# Altium PCB PCB1.PcbDoc (part 4 of 4)
Units mil, origin at the board's own origin, x right, y up, seen from the top; angles counter-clockwise.
Board outline 5048.23 x 6841.54 mil, 6 copper layers (Top Layer, Layer 1, Layer 2, Layer 3, Layer 4, Bottom Layer), stack 32.112 mil thick; 417 components, 339 nets, 2232 pads, 0 vias.
Unrouted connection lines stored in the file: 1169.
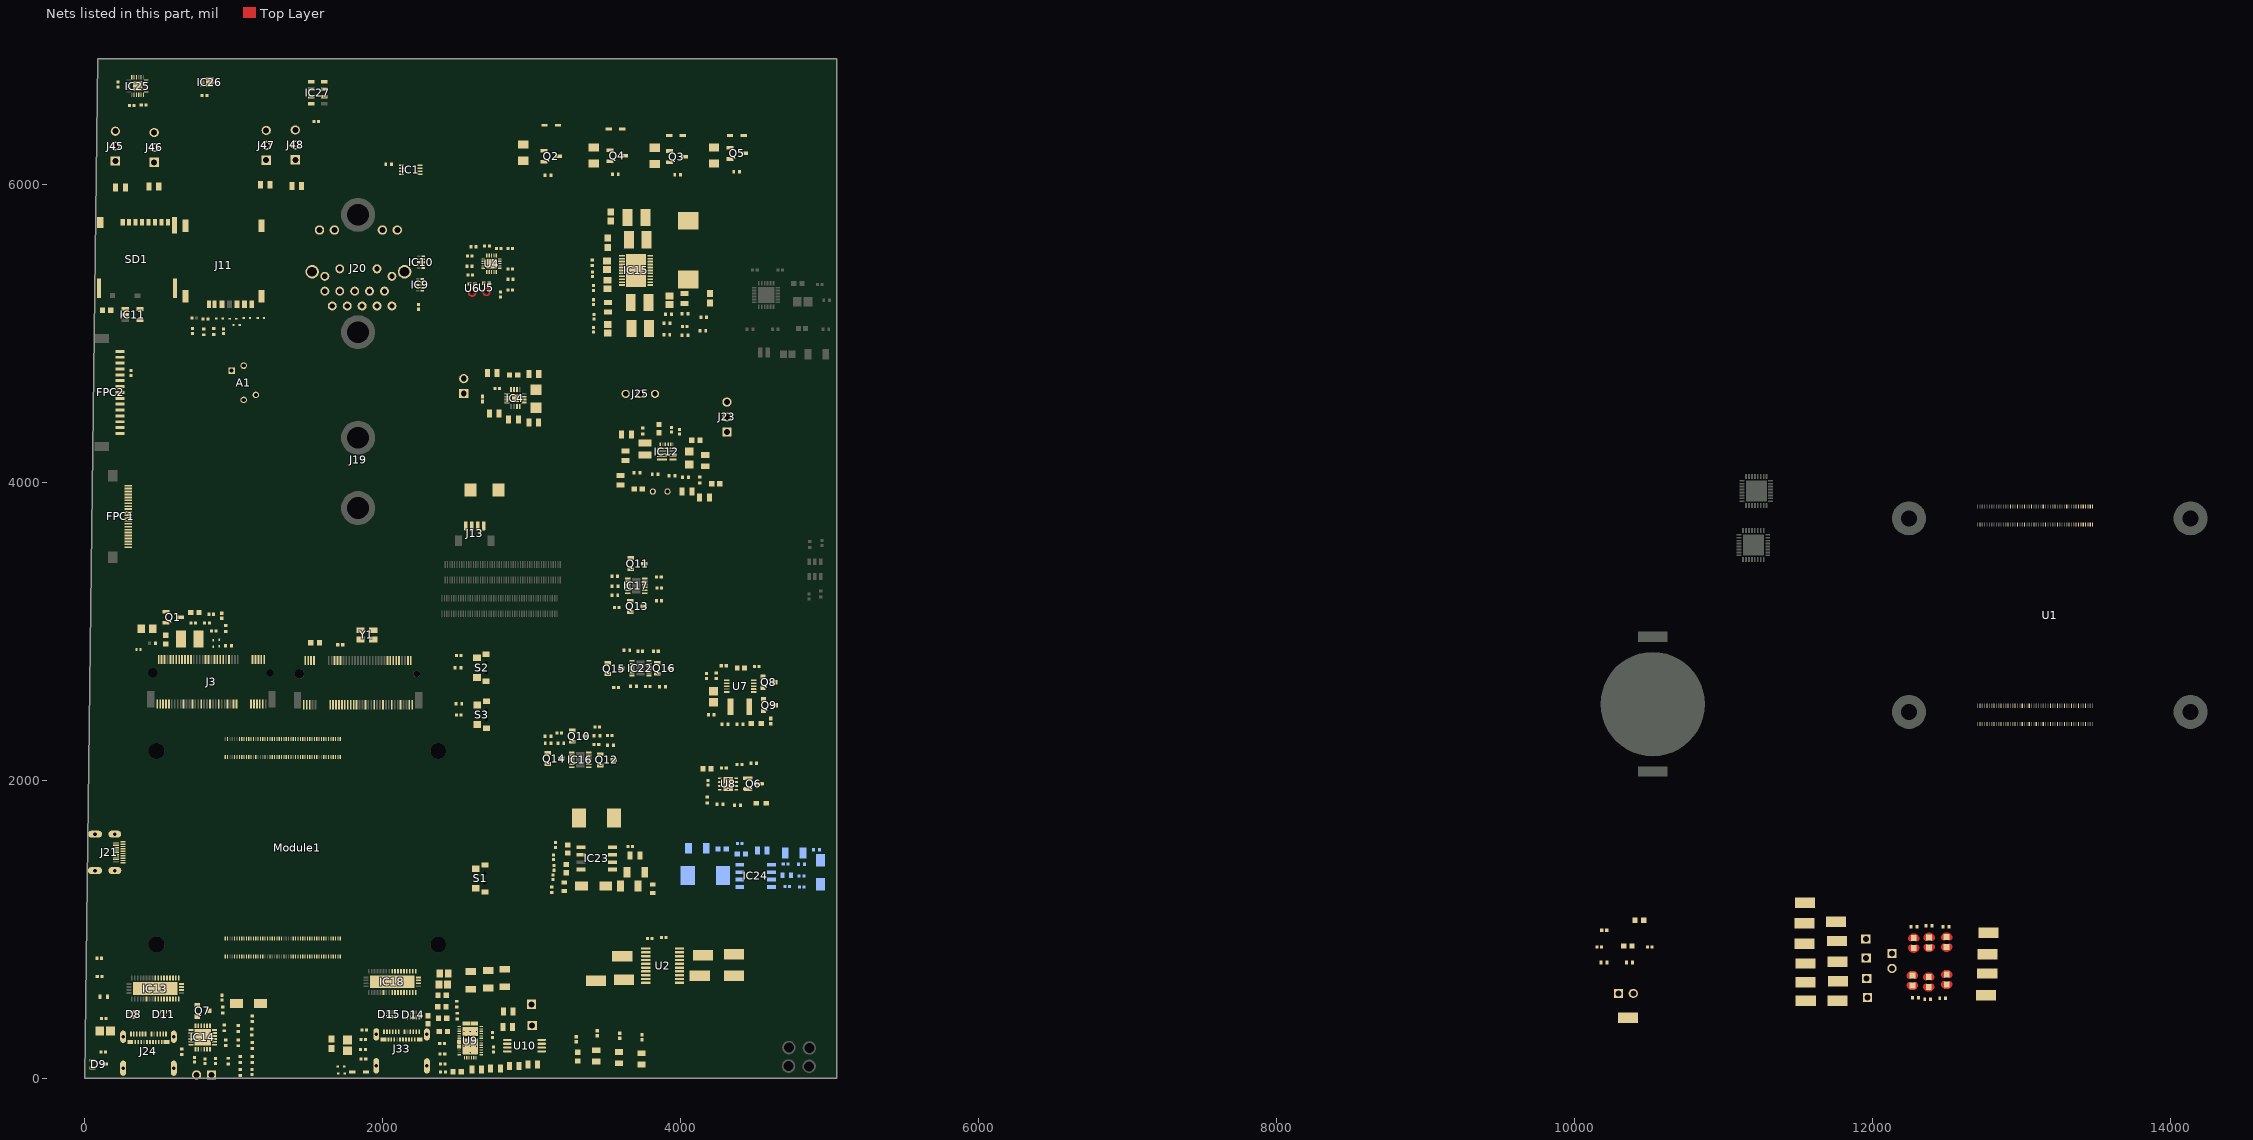
[diagram p3: the nets of this part, all layers, seen from the top]

## Part data (continued)
R80: library part CMP-26527-002093-1, "C25769", Case/Package=0402, Max Operating Temperature=155°C, Max Power Dissipation=63mW, Min Operating Temperature=-55°C, Resistance=3.9R, Resistor Type="Thick Film", Temperature Coefficient=200ppm/°C, Tolerance=5%, Contact Plating=Tin, Features="Automotive AEC-Q200", Height=0.016inch, Length=0.039inch, Mount="Surface Mount", Number of Terminations=2, Packaging="Tape and Reel", Radiation Hardening=No, RoHS Compliant=Yes, Series=RMCF, Width=0.02inch
R90: library part CMP-26527-005729-1, "C22939", Case/Package=0603, Max Operating Temperature=155°C, Max Power Dissipation=100mW, Min Operating Temperature=-55°C, Resistance=1.02kR, Resistor Type="Thick Film", Temperature Coefficient=100ppm/°C, Tolerance=1%, Contact Plating=Tin, Features="Automotive AEC-Q200", Height=0.022inch, Length=0.061inch, Mount="Surface Mount", Number of Terminations=2, Packaging="Tape and Reel", Radiation Hardening=No, RoHS Compliant=Yes, Series=RMCF, Width=0.031inch
R96 R98 R108: library part CMP-26527-002093-1, "C25908", Case/Package=0402, Max Operating Temperature=155°C, Max Power Dissipation=63mW, Min Operating Temperature=-55°C, Resistance=3.9R, Resistor Type="Thick Film", Temperature Coefficient=200ppm/°C, Tolerance=5%, Contact Plating=Tin, Features="Automotive AEC-Q200", Height=0.016inch, Length=0.039inch, Mount="Surface Mount", Number of Terminations=2, Packaging="Tape and Reel", Radiation Hardening=No, RoHS Compliant=Yes, Series=RMCF, Width=0.02inch
R99: library part CMP-26527-005729-1, "C322150", Case/Package=0603, Max Operating Temperature=155°C, Max Power Dissipation=100mW, Min Operating Temperature=-55°C, Resistance=1.02kR, Resistor Type="Thick Film", Temperature Coefficient=100ppm/°C, Tolerance=1%, Contact Plating=Tin, Features="Automotive AEC-Q200", Height=0.022inch, Length=0.061inch, Mount="Surface Mount", Number of Terminations=2, Packaging="Tape and Reel", Radiation Hardening=No, RoHS Compliant=Yes, Series=RMCF, Width=0.031inch
R103: library part CMP-26527-004332-1, "C22797", Case/Package=0603, Max Operating Temperature=155°C, Max Power Dissipation=100mW, Min Operating Temperature=-55°C, Resistance=2.21kR, Resistor Type="Thick Film", Temperature Coefficient=100ppm/°C, Tolerance=1%, Contact Plating=Tin, Features="Automotive AEC-Q200", Height=0.022inch, Length=0.061inch, Mount="Surface Mount", Number of Terminations=2, Packaging="Tape and Reel", Radiation Hardening=No, RoHS Compliant=Yes, Series=RMCF, Width=0.031inch
R105 R122: library part CMP-26527-004332-1, "C22984", Case/Package=0603, Max Operating Temperature=155°C, Max Power Dissipation=100mW, Min Operating Temperature=-55°C, Resistance=2.21kR, Resistor Type="Thick Film", Temperature Coefficient=100ppm/°C, Tolerance=1%, Contact Plating=Tin, Features="Automotive AEC-Q200", Height=0.022inch, Length=0.061inch, Mount="Surface Mount", Number of Terminations=2, Packaging="Tape and Reel", Radiation Hardening=No, RoHS Compliant=Yes, Series=RMCF, Width=0.031inch
R107 R124: library part CMP-26527-002093-1, "C25890", Case/Package=0402, Max Operating Temperature=155°C, Max Power Dissipation=63mW, Min Operating Temperature=-55°C, Resistance=3.9R, Resistor Type="Thick Film", Temperature Coefficient=200ppm/°C, Tolerance=5%, Contact Plating=Tin, Features="Automotive AEC-Q200", Height=0.016inch, Length=0.039inch, Mount="Surface Mount", Number of Terminations=2, Packaging="Tape and Reel", Radiation Hardening=No, RoHS Compliant=Yes, Series=RMCF, Width=0.02inch
R109: library part CMP-26527-002093-1, "C25104", Case/Package=0402, Max Operating Temperature=155°C, Max Power Dissipation=63mW, Min Operating Temperature=-55°C, Resistance=3.9R, Resistor Type="Thick Film", Temperature Coefficient=200ppm/°C, Tolerance=5%, Contact Plating=Tin, Features="Automotive AEC-Q200", Height=0.016inch, Length=0.039inch, Mount="Surface Mount", Number of Terminations=2, Packaging="Tape and Reel", Radiation Hardening=No, RoHS Compliant=Yes, Series=RMCF, Width=0.02inch
R115: library part CMP-26527-002287-1, "C23151", Case Code (Imperial)=0603, Case Code (Metric)=1608, Max Operating Temperature=155°C, Max Power Dissipation=100mW, Min Operating Temperature=-55°C, Resistance=110kR, Resistor Type="Thick Film", Temperature Coefficient=200ppm/°C, Tolerance=5%, Case/Package=0603, Contact Plating=Tin, Features="Automotive AEC-Q200", Height=0.022inch, Lead Free="Lead Free", Length=0.061inch, Mount="Surface Mount", Number of Terminations=2, Packaging="Tape and Reel", Power Rating=100mW, Radiation Hardening=No, RoHS Compliant=Yes, Series=RMCF, Size Code=0603, Width=0.031inch
R117: library part CMP-26527-002093-1, "C25924", Case/Package=0402, Max Operating Temperature=155°C, Max Power Dissipation=63mW, Min Operating Temperature=-55°C, Resistance=3.9R, Resistor Type="Thick Film", Temperature Coefficient=200ppm/°C, Tolerance=5%, Contact Plating=Tin, Features="Automotive AEC-Q200", Height=0.016inch, Length=0.039inch, Mount="Surface Mount", Number of Terminations=2, Packaging="Tape and Reel", Radiation Hardening=No, RoHS Compliant=Yes, Series=RMCF, Width=0.02inch
R118: library part CMP-26527-002093-1, "C51721", Case/Package=0402, Max Operating Temperature=155°C, Max Power Dissipation=63mW, Min Operating Temperature=-55°C, Resistance=3.9R, Resistor Type="Thick Film", Temperature Coefficient=200ppm/°C, Tolerance=5%, Contact Plating=Tin, Features="Automotive AEC-Q200", Height=0.016inch, Length=0.039inch, Mount="Surface Mount", Number of Terminations=2, Packaging="Tape and Reel", Radiation Hardening=No, RoHS Compliant=Yes, Series=RMCF, Width=0.02inch
RNTC1: library part CMP-06022-000440-1, "C338605", Case Code (Imperial)=0805, Case Code (Metric)=2012, Current Rating=100uA, Max Operating Temperature=125°C, Max Power Dissipation=200mW, Min Operating Temperature=-40°C, Package Quantity=4000, Resistance=100kR, Tolerance=5%, Accuracy=3%, Case/Package=0805, Depth=1.25mm, Height=0.85mm, Lead Free="Lead Free", Length=2mm, Mount="Surface Mount", Number of Pins=2, Packaging="Tape and Reel", Power Rating=200mW, Radiation Hardening=No, REACH SVHC="No SVHC", Termination=SMD/SMT, Width=1.25mm
RT1: "THERMISTOR NTC 10KOHM 3380K BEAD", Package="RADIAL-2 Murata", Availability=Good, Check_prices=https://www.snapeda.com/parts/NXRT15XH103FA1B030/Murata/view-part/4970536/?ref=eda, MF=Murata, MP=NXRT15XH103FA1B030, Price=None, Purchase-URL=https://pricing.snapeda.com/search/part/NXRT15XH103FA1B030/?ref=eda, SnapEDA_Link=https://www.snapeda.com/parts/NXRT15XH103FA1B030/Murata/view-part/4970536/?ref=snap
S1 S2 S3: "C393942", Manufacturer_Name="Shou Han", Datasheet Link=https://datasheet.lcsc.com/lcsc/1912111437_SHOU-HAN-TS24CA_C393942.pdf, Height=1.8mm, Manufacturer_Part_Number=TS24CA
SD1: library part "SD Card", "C428492", JLCPCB Part Class="Extended Part", LCSC Part Name="自弹式 MicroSD卡(TF卡) 卡座", Manufacturer=MOLEX, Operating Temperature=-25℃~+85℃, Add into BOM=yes, Additional Card Detection Pins=-, Card Connection Mode=Push-Push, Card Type="MicroSD Card (TF Card)", Connector Type="Connector and Ejector", Convert to PCB=yes, Datasheet=https://www.molex.com/content/dam/molex/molex-dot-com/products/automated/en-us/salesdrawingpdf/503/503398/5033981892_sd.pdf?inline\, Device=5033981892, Height Above Board=1.28mm, Manufacturer Part=5033981892, Supplementary Features=-, Supplier=LCSC, Supplier Footprint=SMD, Supplier Part=C428492, Symbol=503398-1892
U1: "Raspberry Compute Module 5, 8GB RAM, 32GB eMMC, Wireless", Package=None, Check_prices=https://www.snapeda.com/parts/CM5108032/Raspberry+Pi/view-part/?ref=eda, MF="Raspberry Pi", MP=CM5108032, SnapEDA_Link=https://www.snapeda.com/parts/CM5108032/Raspberry+Pi/view-part/?ref=snap
U2: "C53406", Package="TSSOP-20 Texas Instruments", Check_prices=https://www.snapeda.com/parts/TXB0108PWR/Texas+Instruments/view-part/?ref=eda, Digi-Key_Part_Number=296-21527-2-ND, MF="Texas Instruments", MP=TXB0108PWR, Purchase-URL=https://pricing.snapeda.com/search/part/TXB0108PWR/?ref=eda, SnapEDA_Link=https://www.snapeda.com/parts/TXB0108PWR/Texas+Instruments/view-part/?ref=snap
U3: library part ESDBW5V0A1_C5173252, "C5173252", Clamping Voltage=12V, JLCPCB Part Class="Extended Part", Junction Capacitance=60pF, LCSC Part Name="ESD 5V截止", Manufacturer=Leiditech(雷卯电子), Operating Temperature=-55℃~+125℃, Peak Pulse Power Dissipation (Ppp)=360W@8/20us, Reverse Leakage Current (Ir)=100nA, Reverse Stand-Off Voltage (Vrwm)=5V, Voltage - Breakdown=7.2V, Add into BOM=yes, Convert to PCB=yes, Datasheet=https://item.szlcsc.com/datasheet/ESDBW5V0A1/5822823.html, Device=ESDBW5V0A1_C5173252, level of protection="IEC 61000-4-4；IEC 61000-4-5；IEC 61000-4-2", Manufacturer Part=ESDBW5V0A1, Number Of Channels=1, Supplier=LCSC, Supplier Footprint=DFN1006-2, Supplier Part=C5173252, Symbol=ESDBW5V0A1_C5173252, Type=ESD
U4: "C2929446", JLCPCB Part Class="Extended Part", Manufacturer=Everest-semi(顺芯), Operating Temperature=-40℃~+85℃, Voltage - Supply=1.7V~3.6V, Add into BOM=yes, Chip Type Parameters/Description="Stereo Audio ADC", Convert to PCB=yes, Datasheet=https://item.szlcsc.com/datasheet/ES7243E/3264523.html, Device=ES7243E, Interface Type=I2S, LCSC Part Name=ES7243E, Manufacturer Part=ES7243E, Number Of Channels=16, Resolution=24, Supplier=LCSC, Supplier Footprint=QFN-20, Supplier Part=C2929446, Symbol=ES7243E
U5 U6: "C50275773", JLCPCB Part Class="Extended Part", Manufacturer=Gettop(共达), Contributor=lcsc, Manufacturer Part=GTA2718B-3HA, spicePre=U, spiceSymbolName=GTA2718B-3HA, Supplier=LCSC, Supplier Part=C50275773
U7: library part CM1022-CA, "C22446437", Battery Temperature Detection=Support, Charging Saturation Voltage=4.25V, End-Off Voltage=2.5V, JLCPCB Part Class="Extended Part", LCSC Part Name=2节,带温度保护, Manufacturer=iCM(创芯微), Operating Temperature=-40℃~+85℃, Supply Current (Iq)=5uA, Add into BOM=yes, Convert to PCB=yes, Datasheet=https://item.szlcsc.com/datasheet/CM1022-CA/24098222.html, Device=CM1022-CA, Manufacturer Part=CM1022-CA, Number of Cells=2, Supplier=LCSC, Supplier Footprint=MSOP-10, Supplier Part=C22446437, Symbol=CM1022-CA, The Chip Type="Protection IC", Type of Battery=Lithium-ion/Polymer
U8: "C139352", Package="VSON-8 Texas Instruments", Check_prices=https://www.snapeda.com/parts/BQ29209DRBR/Texas+Instruments/view-part/?ref=eda, MF="Texas Instruments", MP=BQ29209DRBR, SnapEDA_Link=https://www.snapeda.com/parts/BQ29209DRBR/Texas+Instruments/view-part/?ref=snap
U9: "C2868209", Package="PowerWFQFN-38 Texas Instruments", Availability="In Stock", Check_prices=https://www.snapeda.com/parts/TPS25750DRJKR/Texas+Instruments/view-part/?ref=eda, MF="Texas Instruments", MP=TPS25750DRJKR, Price=None, Purchase-URL=https://pricing.snapeda.com/search?q=TPS25750DRJKR&ref=eda, SnapEDA_Link=https://www.snapeda.com/parts/TPS25750DRJKR/Texas+Instruments/view-part/?ref=snap
U10: "C110276", JLCPCB Part Class="Extended Part", LCSC Part Name="256Kbits EEPROM，支持I2C协议，具有硬件写保护功能", Manufacturer=BL(上海贝岭), Add into BOM=yes, Convert to PCB=yes, Datasheet=https://atta.szlcsc.com/upload/public/pdf/source/20170428/1493376808838.pdf, Device=BL24C256A-SFRC, Manufacturer Part=BL24C256A-SFRC, Supplier=LCSC, Supplier Footprint=TSSOP-8, Supplier Part=C110276, Symbol=BL24C256A-SFRC
W1 W2 W3 W4 W5 W6: "DNP", Package="NON STANDARD-2 Keystone", Check_prices=https://www.snapeda.com/parts/5102/Keystone/view-part/?ref=eda, MF="Keystone Electronics", MP=5102, SnapEDA_Link=https://www.snapeda.com/parts/5102/Keystone/view-part/?ref=snap
Y1: "C2650753", Manufacturer_Name=ABRACON, Datasheet Link=https://abracon.com/Oscillators/ASEK.pdf, Height=1.2mm, Manufacturer_Part_Number=ASEK-32.768KHZ-L-R-T

## Free pads (board coordinates)
  round 90.55 hole 66.93 paste-99999 mask+1.97: 10(4723.43,81.27) 10(4725.4,205.29) 10(4862.2,79.72) 10(4863.19,202.76)

## Nets (pads, with @x,y where several pads share a name; then routed paths per layer and width w, separated by ;. In a path a pad name is that pad's centre, name@x,y a point inside that pad or via, vN(x,y) a via of type N, cw(c..) or ccw(c..) an arc to the next point about the centre after c; other vN are vias at no path point)
1.8V__SDA: IC1.4 IC26.1 R3.2
1.8V_SCL: IC1.3 IC26.4 R4.2
3V3_M2: C123.2 C124.2 J19.2 J19.4 J19.12 J19.14 J19.16 J19.18 J19.70 J19.72 J19.74 L5.2 LED7.2 R116.1 Y1.1 Y1.4
5V_Direct_PD_Out: C83.2 C109.1 C110.1 C111.1 IC22.2 IC22.3 Q14.1 Q15.2 R97.1 U9.20_22
+1.8V: C9.1 C131.1 IC1.2 IC26.2 Module1.88 Module1.90 R3.1 R4.1 R24.2 R36.1 U2.2 U2.10
+3.9V: C87.2 C88.2 FB1.2 L3.2 LED2.2 R100.1 U3.1
+3.9V_Filtered: C2.1 C3.1 C4.1 C5.1 C6.2 FB1.1 J3.2 J3.4 J3.70 J3.72 J3.74
+3V3: A1.2 C8.1 C14.1 C16.2 C18.2 C19.1 C25.2 C26.2 C28.2 C33.1 C114.1 C132.1 C133.1 C134.1 FPC1.22 FPC2.14 FPC2.15 IC5.1 IC6.1 IC7.1 IC8.1 IC11.5 IC13.6 IC13.13 IC13.20 IC13.30 IC18.6 IC18.13 IC18.20 IC18.30 IC25.8 IC25.13 IC27.1 J20.15 J20.17 LED6.2 Module1.78 Module1.84 Module1.86 R1.2 R2.2 R5.2 R6.1 R10.2 R12.2 R14.2 R15.2 R21.2 R22.2 R23.2 R33.2 R34.2 R35.1 R67.1 R68.1 R74.2 R77.1 R79.2 R82.2 R84.2 R121.1 U2.19 U4.1 U4.5 U4.12 U5.1 U6.1 U9.38
+3V3_SD: C32.1 IC11.1 SD1.4
+5: C39.1 C43.1 C69.2 C89.1 C90.1 C91.1 C92.2 C118.1 C119.2 C120.2 C121.2 C125.1 C126.1 C127.1 IC12.16 IC16.9 IC22.9 IC23.2 IC24.2 J13.1 J21.19 J22.1 J45.2 J46.2 J47.2 J48.2 L1.2 LED3.1 Module1.77 Module1.79 Module1.81 Module1.83 Module1.85 Module1.87 Q12.2 Q16.2 R11.2 R13.1 R43.1 R44.1 R50.1 R72.1 R83.1 U9.34_35
Alerion1_PWM: J45.3 R126.1
Alerion2_PWM: J46.3 R127.1
Alerion3_PWM: J47.3 R128.1
Alerion4_PWM: J48.3 R129.1
Alert_USB_Bat: IC14.19 J28.1 R77.2
Bat+: C50.1 D13.2 IC12.12 J23.1 J25.3 R39.2 R42.2 R55.1
Bat-: C34.1 C38.2 C40.1 C44.1 C48.2 J23.3 J25.1 R61.1 R64.1 RNTC1.1 U7.3 U8.5 U8.6 U8.9
Buck_Input: C70.2 D13.1 IC17.9 Q13.2 R73.1
Buck_Out_5V: C53.2 C72.1 C73.1 C74.1 C75.1 C76.2 IC16.2 IC16.3 Q10.2 R95.2
Buck_VREG_5V: C65.1 IC15.18 R93.1
CAM_GPIO0: FPC1.17 Module1.97
CAM_GPIO1: FPC1.18 Module1.100
Ccllular_Status_LED: J3.10 LED1.1
Cellular_Reset: C7.2 J3.67 Module1.45 Q1.3
"Charging Select": IC12.9 R58.1 R62.2
DPHY0_C_N: FPC1.8 Module1.127
DPHY0_C_P: FPC1.9 Module1.129
DPHY0_D0_N: FPC1.2 Module1.115
DPHY0_D0_P: FPC1.3 Module1.117
DPHY0_D1_N: FPC1.5 Module1.121
DPHY0_D1_P: FPC1.6 Module1.123
DPHY0_D2_N: FPC1.11 Module1.133
DPHY0_D2_P: FPC1.12 Module1.135
DPHY0_D3_N: FPC1.14 Module1.139
DPHY0_D3_P: FPC1.15 Module1.141
DPHY1_C_N: FPC2.5 Module1.187
DPHY1_C_P: FPC2.6 Module1.189
DPHY1_D0_N: FPC2.8 Module1.175
DPHY1_D0_P: FPC2.9 Module1.177
DPHY1_D1_N: FPC2.2 Module1.181
DPHY1_D1_P: FPC2.3 Module1.183
Drain_Floating: U9.15 U9.30 U9.40
E_LED_G: J20.16 Module1.17
E_LED_Y: J20.18 Module1.15
Enable_Charger: IC12.7 Q6.3 R52.2 R60.1
Ethernet_nLED3: U1.15
Ethernet_Pair0_N: U1.10
Ethernet_Pair0_P: U1.4
Ethernet_Pair1_N: U1.6
Ethernet_Pair1_P: U1.12
Ethernet_Pair2_N: U1.9
Ethernet_Pair2_P: U1.11
Ethernet_Pair3_N: U1.5
Ethernet_Pair3_P: U1.3
FAN_PWM: J13.2 Module1.19
Fan_Tacho: J13.4 Module1.16 U1.16
GND: A1.3 C1.2 C2.2 C3.2 C4.2 C5.2 C6.1 C7.1 C8.2 C9.2 C10.1 C11.1 C12.1 C13.1 C14.2 C15.2 C16.1 C17.1 C18.1 C19.2 C21.2 C22.2 C24.1 C25.1 C26.1 C27.2 C28.1 C29.1 C30.1 C31.1 C32.2 C33.2 C35.2 C37.2 C39.2 C41.2 C42.2 C43.2 C46.1 C47.2 C49.2 C50.2 C52.2 C53.1 C54.1 C56.1 C57.1 C58.2 C59.2 C60.2 C61.2 C64.2 C65.2 C66.2 C67.2 C68.2 C69.1 C70.1 C71.2 C72.2 C73.2 C74.2 C75.2 C78.2 C79.2 C80.2 C81.2 C83.1 C84.1 C87.1 C88.1 C89.2 C90.2 C91.2 C92.1 C93.2 C96.2 C97.2 C98.2 C99.2 C100.2 C101.2 C102.2 C108.2 C109.2 C110.2 C111.2 C114.2 C116.2 C117.2 C118.2 C119.1 C120.1 C121.1 C123.1 C124.1 C125.2 C126.2 C127.2 C129.2 C130.2 C131.2 C132.2 C133.2 C134.2 C135.1 D1.2 D2.2 D3.2 D4.2 D5.2 D6.2 D7.2 D8.3 D8.8 D9.3 D10.2 D11.3 D11.8 D14.3 D14.8 D15.3 D15.8 D16.2 D17.2 D18.2 D19.2 FPC1.1 FPC1.4 FPC1.7 FPC1.10 FPC1.13 FPC1.16 FPC1.19 FPC2.1 FPC2.4 FPC2.7 FPC2.10 FPC2.13 IC1.1 IC4.3 IC4.11 IC4.15 IC4.17 IC9.3 IC9.8 IC10.3 IC10.8 IC11.2 IC12.5 IC12.8 IC12.15 IC13.10 IC13.14 IC13.17 IC13.19 IC13.21 IC13.43 IC14.10 IC14.12 IC14.13 IC14.22 IC14.25 IC15.23 IC16.7 IC17.7 IC18.10 IC18.14 IC18.17 IC18.19 IC18.21 IC18.43 IC19.2 IC22.7 IC23.7 IC24.7 IC25.11 IC25.18 IC25.20 IC25.25 IC26.3 IC26.9 IC27.2 IC27.3 J3.3 J3.5 J3.11 J3.21 J3.27 J3.33 J3.39 J3.45 J3.51 J3.57 J3.69 J3.71 J3.73 J3.75 J11.8 J11.9 J11.10 J11.11 J11.C5 J13.3 J19.1 J19.3 J19.9 J19.15 J19.21 J19.27 J19.33 J19.39 J19.45 J19.51 J19.57 J19.71 J19.73 J19.75 J20.19 J20.20 J21.4 J21.7 J21.10 J21.13 J21.16 J21.20 J22.2 J24.0 J24.A1 J24.A12 J24.B1 J24.B12 J33.0 J33.A1 J33.A12 J33.B1 J33.B12 J45.1 J46.1 J47.1 J48.1 Module1.1 Module1.2 Module1.7 Module1.8 Module1.13 Module1.14 Module1.22 Module1.23 Module1.32 Module1.33 Module1.43 Module1.52 Module1.53 Module1.59 Module1.60 Module1.65 Module1.66 Module1.71 Module1.74 Module1.98 Module1.101 Module1.107 Module1.108 Module1.113 Module1.114 Module1.119 Module1.120 Module1.125 Module1.126 Module1.131 Module1.132 Module1.137 Module1.138 Module1.144 Module1.150 Module1.155 Module1.156 Module1.161 Module1.162 Module1.167 Module1.168 Module1.173 Module1.174 Module1.179 Module1.180 Module1.185 Module1.186 Module1.191 Module1.192 Module1.197 Module1.198 Q1.2 Q2.2 Q3.2 Q4.2 Q5.2 Q6.2 Q9.2 Q14.2 R25.2 R26.1 R27.1 R28.1 R29.1 R37.1 R46.2 R49.2 R59.2 R60.2 R63.2 R75.1 R76.1 R78.1 R80.2 R81.1 R86.1 R89.1 R96.2 R97.2 R98.2 R99.1 R105.1 R107.2 R108.2 R110.1 R111.1 R122.1 R124.2 RT1.1 S1.1 S1.2 S1.4 S2.1 S2.2 S2.4 S3.1 S3.2 S3.4 SD1.6 SD1.11 U1.1 U1.2 U1.7 U1.8 U1.13 U1.14 U1.22 U1.23 U1.32 U1.33 U1.42 U1.43 U1.52 U1.53 U1.59 U1.60 U1.65 U1.66 U1.71 U1.74 U1.98 U1.107 U1.108 U1.113 U1.114 U1.119 U1.120 U1.125 U1.126 U1.131 U1.132 U1.137 U1.138 U1.144 U1.150 U1.155 U1.156 U1.161 U1.162 U1.167 U1.168 U1.173 U1.174 U1.179 U1.180 U1.185 U1.186 U1.191 U1.192 U1.197 U1.198 U2.7 U2.8 U2.9 U2.11 U2.12 U2.13 U2.14 U3.2 U4.2 U4.4 U4.8 U4.13 U4.17 U4.21 U5.3 U6.3 U9.11 U9.12 U9.14 U9.18 U9.31 U9.39 U10.1 U10.2 U10.3 U10.4 U10.7 Y1.2 | length 290.5
  Top Layer w8.89: 2622.83,5272.83 ccw(c2599.72,5272.83) 2622.83,5272.83 ; 2718.83,5277.83 ccw(c2695.72,5277.83) 2718.83,5277.83
GPIO2_SDA: A1.1 IC1.5 Module1.58 U4.18 U9.8
GPIO3_SCL: A1.4 IC1.6 Module1.56 U4.19 U9.9
GPIO4: Module1.54 U4.20
GPIO5: J14.1 Module1.34 R19.1 R126.2
GPIO6: J17.1 Module1.30 R20.1 R127.2
GPIO7: IC27.4 J44.1 Module1.37
GPIO8: IC25.22 Module1.39
GPIO9: IC25.9 IC27.6 J43.1 Module1.40
GPIO10: IC25.24 IC27.7 J42.1 Module1.44
GPIO11: IC25.23 IC27.8 J41.1 Module1.38
GPIO12: J15.1 Module1.31 R31.1 R128.2
GPIO13: J16.1 Module1.28 R32.1 R129.2
GPIO14: J18.2 J49.1 Module1.55 W4.2 W5.2 W6.2
GPIO15: J18.1 Module1.51 W1.1 W2.1 W3.1
GPIO16: Module1.29 R17.1 R18.2
GPIO17: J3.6 Module1.50
GPIO18: IC4.16 Module1.49 U4.6
GPIO19: IC4.14 Module1.26 U4.7
GPIO20: Module1.27 U4.3
GPIO21: IC4.1 Module1.25
GPIO22: J3.8 Module1.46
GPIO23: J3.23 Module1.47 R5.1
GPIO25: IC25.12 Module1.41
GPIO26: C29.2 Module1.24 R33.1 S2.3
GPIO27: C30.2 Module1.48 R34.1 S3.3
"GPIO USB BAT": IC14.15 J26.1 R67.2
HDMI0_CEC: J21.15 Module1.151
HDMI0_CK_N: J21.14 Module1.190
HDMI0_CK_P: J21.12 Module1.188
HDMI0_D0_N: J21.11 Module1.184
HDMI0_D0_P: J21.9 Module1.182
HDMI0_D1_N: J21.8 Module1.178
HDMI0_D1_P: J21.6 Module1.176
HDMI0_D2_N: J21.5 Module1.172
HDMI0_D2_P: J21.3 Module1.170
HDMI0_HOTPLUG: J21.1 Module1.153
HDMI0_SCL: J21.17 Module1.200
HDMI0_SDA: J21.18 Module1.199
I2CM_SCL_Power: R112.1 R123.1 U9.17
I2CM_SDA_Power: R113.1 R125.1 U9.16
ID_SC: FPC2.11 Module1.35
ID_SD: FPC2.12 Module1.36
LED_nACT: Module1.21 R30.1
Midtap: J23.2 J25.2 R41.2 R51.1 R57.1
N: IC4.10 J12.1
NetC1_1: C1.1 IC1.7 IC1.8 R2.1
NetC15_1: C15.1 C17.2 IC4.7 IC4.8 R10.1 R11.1
NetC20_1: C20.1 U4.16
NetC20_2: C20.2 U5.2
NetC21_1: C21.1 U4.15
NetC22_1: C22.1 U4.14
NetC23_1: C23.1 U6.2
NetC23_2: C23.2 U4.9
NetC24_2: C24.2 U4.10
NetC27_1: C27.1 U4.11
NetC31_2: C31.2 J20.4 J20.5
NetC34_2: C34.2 R39.1 U7.1
NetC35_1: C35.1 IC12.10 IC12.13
NetC36_1: C36.1 IC12.11
NetC36_2: C36.2 IC12.14 L1.1
NetC37_1: C37.1 IC12.3
NetC38_1: C38.1 R41.1 U7.2
NetC40_2: C40.2 R42.1 U8.7
NetC44_2: C44.2 C45.1 R51.2 U8.2
NetC45_2: C45.2 R55.2 U8.1
NetC48_1: C48.1 U8.4
NetC51_2: C51.2 R69.1
NetC52_1: C52.1 D12.1 R66.2 R71.1
NetC54_2: C54.2 C62.2 IC16.10 IC16.12 Q10.3 Q12.3 R94.2
NetC55_1: C55.1 IC15.6 IC15.7 IC15.8 IC15.9 IC15.10 IC15.11 L2.1 R90.2 R95.1
NetC55_2: C55.2 R85.1
NetC57_2: C57.2 C63.2 IC17.6 IC17.10 IC17.12 Q11.3 Q13.3
NetC62_1: C62.1 IC16.11
NetC63_1: C63.1 IC17.11
NetC66_1: C66.1 IC14.21
NetC68_1: C68.1 IC14.23
NetC71_1: C71.1 R90.1
NetC76_1: C76.1 C77.1 L2.2
NetC77_2: C77.2 IC15.1 R72.2 R75.2
NetC82_1: C82.1 R99.2
NetC84_2: C84.2 C85.2 IC22.6 IC22.10 IC22.12 Q15.3 Q16.3
NetC85_1: C85.1 IC22.11
NetC86_1: C86.1 IC23.1
NetC86_2: C86.2 D18.1 IC23.8 L3.1
NetC93_1: C93.1 C94.1 IC23.6
NetC94_2: C94.2 R105.2
NetC96_1: C96.1 IC23.4
NetC97_1: C97.1 U9.4
NetC122_1: C122.1 IC24.1
NetC122_2: C122.2 D19.1 IC24.8 L5.1
NetC128_1: C128.1 C129.1 IC24.6
NetC128_2: C128.2 R122.2
NetC130_1: C130.1 IC24.4
NetC135_2: C135.2 IC25.10
NetD4_1: D4.1 J11.C7 R8.1
NetD5_1: D5.1 J11.C2 R9.2
NetIC4_2: IC4.2 R17.2 R18.1
NetIC4_4: IC4.4 R16.2
NetIC5_2: IC5.2 Q2.3 R14.1
NetIC6_2: IC6.2 Q3.3 R15.1
NetIC7_2: IC7.2 Q4.3 R21.1
NetIC8_2: IC8.2 Q5.3 R22.1
NetIC12_1: IC12.1 LED8.2
NetIC12_4: IC12.4 R40.1 R45.2
NetIC14_11: IC14.11 J30.1
NetIC14_18: IC14.18 R71.2
NetIC15_2: IC15.2 R73.2 R80.1
NetIC15_4: IC15.4 R85.2
NetIC15_5: IC15.5 R83.2 R86.2
NetIC15_20: IC15.20 R81.2
NetIC15_21: IC15.21 R78.2
NetIC15_22: IC15.22 R76.2
NetIC16_1: IC16.1 Q10.1
NetIC16_4: IC16.4 R87.1
NetIC16_5: IC16.5 R91.1 R96.1
NetIC16_6: IC16.6 Q14.3 R94.1
NetIC16_8: IC16.8 Q12.1
NetIC17_1: IC17.1 Q11.1
NetIC17_4: IC17.4 R88.1
NetIC17_5: IC17.5 R92.1 R98.1
NetIC17_8: IC17.8 Q13.1
NetIC22_1: IC22.1 Q15.1
NetIC22_4: IC22.4 R101.1
NetIC22_5: IC22.5 R104.1 R108.1
NetIC22_8: IC22.8 Q16.1
NetIC23_5: IC23.5 R103.1 R107.1
NetIC24_5: IC24.5 R119.2 R124.1
NetJ3_26: J3.26 R6.2
NetJ4_1: J4.1 U2.20
NetJ5_1: J5.1 U2.18
NetJ6_1: J6.1 U2.17
NetJ7_1: J7.1 U2.15
NetJ8_1: J8.1 U2.16
NetJ19_10: J19.10 R38.1
NetJ19_68: J19.68 Y1.3
NetJ36_1: J36.1 R123.2 U10.6
NetJ39_1: J39.1 R125.2 U10.5
NetLED1_2: LED1.2 R1.1
NetLED2_1: LED2.1 R26.2
NetLED3_2: LED3.2 R27.2
NetLED4_2: LED4.2 R28.2
NetLED5_2: LED5.2 R29.2
NetLED6_1: LED6.1 R30.2
NetLED7_1: LED7.1 R38.2
NetLED8_1: LED8.1 R43.2
NetQ1_1: Q1.1 R7.2
NetQ2_1: Q2.1 R19.2
NetQ3_1: Q3.1 R20.2
NetQ4_1: Q4.1 R31.2
NetQ5_1: Q5.1 R32.2
NetQ6_1: Q6.1 R47.1
NetQ7_1: Q7.1 R65.2 R69.2 R70.1
NetQ8_1: Q8.1 R53.1
NetQ8_2: Q8.2 R56.1 R61.2
NetQ8_3: Q8.3 Q9.3 R64.2
NetQ9_1: Q9.1 R54.1
NetR12_1: R12.1 R13.2 R16.1
NetR23_1: R23.1 W1.2
NetR24_1: R24.1 W2.2
NetR25_1: R25.1 W3.2
NetR35_2: R35.2 W4.1
NetR36_2: R36.2 W5.1
NetR37_2: R37.2 W6.1
NetR45_1: R45.1 R49.1 R50.2
NetR46_1: R46.1 U7.10
NetR48_1: R48.1 RNTC1.2 U7.5
NetR48_2: R48.2 U7.6
NetR53_2: R53.2 U7.8
NetR54_2: R54.2 U7.9
NetR56_2: R56.2 U7.7
NetR57_2: R57.2 U8.3
NetR58_2: R58.2 R59.1
NetR62_1: R62.1 R63.1
NetR87_2: R87.2 R91.2
NetR88_2: R88.2 R92.2
NetR100_2: R100.2 R103.2
NetR101_2: R101.2 R104.2
NetR110_2: R110.2 U9.3
NetR111_2: R111.2 U9.10
NetR116_2: R116.2 R119.1
NetR120_2: R120.2 R121.2 U10.8
Out: R47.2 U8.8
P: IC4.9 J12.2
PCIE_CLK_N: J19.53 Module1.112
PCIE_CLK_P: J19.55 Module1.110
PCIE_nCLKREQ: J19.52 Module1.102
PCIE_nRST: J19.50 Module1.109
PCIE_nWAKE: J19.54 Module1.104
PCIE_PWR_EN: IC24.3 Module1.106
PCIE_RX_N: J19.43 Module1.118
PCIE_RX_P: J19.41 Module1.116
PCIE_TX_N: J19.49 Module1.124
PCIE_TX_P: J19.47 Module1.122
PDO2: IC14.20 J29.1 R79.1
PDO3: IC14.14 J27.1 R74.1
PGOOD: IC15.3 R93.2
PWR_BUT: Module1.92 S1.3
Reset_USB_Bat_PD: IC14.6 J32.1 R89.2
SCL0: FPC1.20 Module1.80
SCL_USB_BAT: IC14.7 J31.1 R84.1
SD_CLK: Module1.57 SD1.5
SD_CMD: Module1.62 SD1.3
SD_DAT0: Module1.63 SD1.7
SD_DAT1: Module1.67 SD1.8
SD_DAT2: Module1.69 SD1.1
SD_DAT3: Module1.61 SD1.2
SD_PWR_ON: IC11.4 Module1.75
SDA0: FPC1.21 Module1.82
SDA_USB_BAT: IC14.8 J31.2 R82.1
SIM7600_SCL: J3.40
SIM7600_SDA: J3.42
SIM_GPIO3: J3.64 J10.1
SIM_GPIO77: J3.62 J9.1
Temp: R40.2 R44.2 RT1.2
TR0_TAP: J20.11
TR1_TAP: J20.12
TR2_TAP: J20.13
TR3_TAP: J20.14
TRD0_N: IC9.4 J20.2 Module1.10
TRD0_P: IC9.5 J20.1 Module1.12
TRD1_N: IC9.2 J20.6 Module1.6
TRD1_P: IC9.1 J20.3 Module1.4
TRD2_N: IC10.4 J20.8 Module1.9
TRD2_P: IC10.5 J20.7 Module1.11
TRD3_N: IC10.2 J20.10 Module1.5
TRD3_P: IC10.1 J20.9 Module1.3
UART_CTS: J3.56 U2.5
UART_DTR: J3.52 U2.6
UART_RTS: J3.54 U2.4
UART_RX: J3.58 U2.3
UART_TX: J3.60 U2.1
USB2_D_N: D2.1 J3.9 Module1.103
USB2_D_P: D1.1 J3.7 Module1.105
USB3-0-RX_N: IC13.16 Module1.128
USB3-0-RX_P: IC13.15 Module1.130
USB3-0-TX_N: IC13.12 Module1.140
USB3-0-TX_P: IC13.11 Module1.142
USB3-1-RX_N: IC18.16 Module1.157
USB3-1-RX_P: IC18.15 Module1.159
USB3-1-TX_N: IC18.12 Module1.169
USB3-1-TX_P: IC18.11 Module1.171
USB_Bat_CC1: D9.1 IC14.1 IC14.2 J24.A5
USB_Bat_CC2: D9.2 IC14.4 IC14.5 J24.B5
USB_Bat_D_N: J24.A7 J24.B7 Module1.136
USB_Bat_D_P: J24.A6 J24.B6 Module1.134
USB_Bat_Orientation: IC13.9 IC14.17 R68.2
USB_Bat_RX1_N: D8.5 IC13.22 J24.B10
USB_Bat_RX1_P: D8.4 IC13.23 J24.B11
USB_Bat_RX2_N: D11.5 IC13.26 J24.A10
USB_Bat_RX2_P: D11.4 IC13.27 J24.A11
USB_Bat_TX1_N: D8.2 IC13.24 J24.A3
USB_Bat_TX1_P: D8.1 IC13.25 J24.A2
USB_Bat_TX2_N: D11.2 IC13.28 J24.B3
USB_Bat_TX2_P: D11.1 IC13.29 J24.B2
USB_PD_3V3: C108.1 R112.2 R113.2 R120.1 U9.1 U9.2
USB_Power_CC1: C116.1 J33.A5 U9.28
USB_Power_CC2: C117.1 J33.B5 U9.29
USB_Power_D_N: D16.1 J33.A7 J33.B7 Module1.165
USB_Power_D_P: D17.1 J33.A6 J33.B6 Module1.163
USB_Power_GPIO0: J34.1 U9.5
USB_Power_GPIO1: J35.1 U9.6
USB_Power_GPIO2: J37.1 U9.7
USB_Power_GPIO4: J38.1 U9.26
USB_Power_GPIO5: J40.1 U9.27
USB_Power_Orientation: IC18.9 U9.19
USB_Power_RX1_N: D15.5 IC18.26 J33.B10
USB_Power_RX1_P: D15.4 IC18.27 J33.B11
USB_Power_RX2_N: D14.5 IC18.22 J33.A10
USB_Power_RX2_P: D14.4 IC18.23 J33.A11
USB_Power_TX1_N: D15.2 IC18.28 J33.A3
USB_Power_TX1_P: D15.1 IC18.29 J33.A2
USB_Power_TX2_N: D14.2 IC18.24 J33.B3
USB_Power_TX2_P: D14.1 IC18.25 J33.B2
USIM_CLK: C13.2 D7.1 J3.32 J11.C3
USIM_DATA: C11.2 J3.34 R8.2
USIM_DET: D6.1 J3.66 J11.CD
USIM_RST: J3.30 R9.1
USIM_VDD: C10.2 D3.1 J3.36 J11.C1
Vbus_en_sink: IC14.16 R70.2
VCC_USB_Bat: C41.1 C42.1 C46.2 C47.1 C49.1 C67.1 D10.1 D12.2 IC14.24 J24.A4 J24.A9 J24.B4 J24.B9 LED4.1 Q7.2 R65.1 R66.1
VCC_USB_Bat_Sink: C51.1 C56.2 C58.1 C59.1 C60.1 C61.1 C64.1 IC15.12 IC15.13 IC15.14 IC15.15 IC15.16 IC15.17 IC15.19 IC17.2 IC17.3 Q7.3 Q11.2 R52.1
VCC_USB_Power: C78.1 C79.1 C80.1 C81.1 C82.2 C98.1 C99.1 C100.1 C101.1 C102.1 IC19.1 J33.A4 J33.A9 J33.B4 J33.B9 LED5.1 U9.23_25 U9.32_33
pads on no net: BT1.1 BT1.2 C12.2 C95.1 C95.2 C103.1 C103.2 C104.1 C104.2 C105.1 C105.2 C106.1 C106.2 C107.1 C107.2 C112.1 C112.2 C113.1 C113.2 C115.1 C115.2 D8.6 D8.7 D8.9 D8.10 D11.6 D11.7 D11.9 D11.10 D14.6 D14.7 D14.9 D14.10 D15.6 D15.7 D15.9 D15.10 FPC1.23 FPC1.24 FPC2.16 FPC2.17 IC2.1 IC2.2 IC2.3 IC2.4 IC2.5 IC2.6 IC2.7 IC2.8 IC2.9 IC2.10 IC2.11 IC2.12 IC2.13 IC2.14 IC2.15 IC2.16 IC2.17 IC2.18 IC2.19 IC2.20 IC2.21 IC2.22 IC2.23 IC2.24 IC2.25 IC2.26 IC2.27 IC2.28 IC2.29 IC2.30 IC2.31 IC2.32 IC2.33 IC3.1 IC3.2 IC3.3 IC3.4 IC3.5 IC3.6 IC3.7 IC3.8 IC3.9 IC3.10 IC3.11 IC3.12 IC3.13 IC3.14 IC3.15 IC3.16 IC3.17 IC3.18 IC3.19 IC3.20 IC3.21 IC3.22 IC3.23 IC3.24 IC3.25 IC3.26 IC3.27 IC3.28 IC3.29 IC3.30 IC3.31 IC3.32 IC3.33 IC4.5 IC4.6 IC4.12 IC4.13 IC9.6 IC9.7 IC9.9 IC9.10 IC10.6 IC10.7 IC10.9 IC10.10 IC11.3 IC12.2 IC12.6 IC13.1 IC13.2 IC13.3 IC13.4 IC13.5 IC13.7 IC13.8 IC13.18 IC13.31 IC13.32 IC13.33 IC13.34 IC13.35 IC13.36 IC13.37 IC13.38 IC13.39 IC13.40 IC13.41 IC13.42 IC14.3 IC14.9 IC16.13 IC17.13 IC18.1 IC18.2 IC18.3 IC18.4 IC18.5 IC18.7 IC18.8 IC18.18 IC18.31 IC18.32 IC18.33 IC18.34 IC18.35 IC18.36 IC18.37 IC18.38 IC18.39 IC18.40 IC18.41 IC18.42 IC20.1 IC20.2 IC20.3 IC20.4 IC20.5 IC20.6 IC20.7 IC20.8 IC20.9 IC20.10 IC20.11 IC20.12 IC20.13 IC20.14 IC20.15 IC20.16 IC20.17 IC20.18 IC20.19 IC20.20 IC20.21 IC20.22 IC20.23 IC20.24 IC20.25 IC21.1 IC21.2 IC21.3 IC21.4 IC21.5 IC21.6 IC22.13 IC23.3 IC25.1 IC25.2 IC25.3 IC25.4 IC25.5 IC25.6 IC25.7 IC25.14 IC25.15 IC25.16 IC25.17 IC25.19 IC25.21 IC26.5 IC26.6 IC26.7 IC26.8 IC27.5 J1.1 J1.2 J1.3 J1.4 J1.5 J1.6 J1.7 J1.8 J1.9 J1.10 J1.11 J1.12 J1.13 J1.14 J1.15 J1.16 J1.17 J1.18 J1.19 J1.20 J1.21 J1.22 J1.23 J1.24 J1.25 J1.26 J1.27 J1.28 J1.29 J1.30 J1.31 J1.32 J1.33 J1.34 J1.35 J1.36 J1.37 J1.38 J1.39 J1.40 J1.41 J1.42 J1.43 J1.44 J1.45 J1.46 J1.47 J1.48 J1.49 J1.50 J1.51 J1.52 J1.53 J1.54 J1.55 J1.56 J1.57 J1.58 J1.59 J1.60 J1.61 J1.62 J1.63 J1.64 J1.65 J1.66 J1.67 J1.68 J1.69 J1.70 J1.71 J1.72 J1.73 J1.74 J1.75 J1.76 J1.77 J1.78 J1.79 J1.80 J1.81 J1.82 J1.83 J1.84 J1.85 J1.86 J1.87 J1.88 J1.89 J1.90 J1.91 J1.92 J1.93 J1.94 J1.95 J1.96 J1.97 J1.98 J1.99 J1.100 J2.1 J2.2 J2.3 J2.4 J2.5 J2.6 J2.7 J2.8 J2.9 J2.10 J2.11 J2.12 J2.13 J2.14 J2.15 J2.16 J2.17 J2.18 J2.19 J2.20 J2.21 J2.22 J2.23 J2.24 J2.25 J2.26 J2.27 J2.28 J2.29 J2.30 J2.31 J2.32 J2.33 J2.34 J2.35 J2.36 J2.37 J2.38 J2.39 J2.40 J2.41 J2.42 J2.43 J2.44 J2.45 J2.46 J2.47 J2.48 J2.49 J2.50 J2.51 J2.52 J2.53 J2.54 J2.55 J2.56 J2.57 J2.58 J2.59 J2.60 J2.61 J2.62 J2.63 J2.64 J2.65 J2.66 J2.67 J2.68 J2.69 J2.70 J2.71 J2.72 J2.73 J2.74 J2.75 J2.76 J2.77 J2.78 J2.79 J2.80 J2.81 J2.82 J2.83 J2.84 J2.85 J2.86 J2.87 J2.88 J2.89 J2.90 J2.91 J2.92 J2.93 J2.94 J2.95 J2.96 J2.97 J2.98 J2.99 J2.100 J3.1 J3.20 J3.22 J3.24 J3.25 J3.28 J3.29 J3.31 J3.35 J3.37 J3.38 J3.41 J3.43 J3.44 J3.46 J3.47 J3.48 J3.49 J3.50 J3.53 J3.55 J3.59 J3.61 J3.63 J3.65 J3.68 J3.76 J3.77 J3.78 J3.79 J11.C6 J13.MP J19.5 J19.6 J19.7 J19.8 J19.11 J19.13 J19.17 J19.19 J19.20 J19.22 J19.23 J19.24 J19.25 J19.26 J19.28 J19.29 J19.30 J19.31 J19.32 J19.34 J19.35 J19.36 J19.37 J19.38 J19.40 J19.42 J19.44 J19.46 J19.48 J19.56 J19.58 J19.67 J19.69 J19.M1 J19.M2 J19.M3 J19.M4 J19.S1 J19.S2 J19.Un1 J19.Un2 J21.2 J24.A8 J24.B8 J33.A8 J33.B8 L4.1 L4.2 Module1.18 Module1.20 Module1.42 Module1.64 Module1.68 Module1.70 Module1.72 Module1.73 Module1.76 Module1.89 Module1.91 Module1.93 Module1.94 Module1.95 Module1.96 Module1.99 Module1.111 Module1.143 Module1.145 Module1.146 Module1.147 Module1.148 Module1.149 Module1.152 Module1.154 Module1.158 Module1.160 Module1.164 Module1.166 Module1.193 Module1.194 Module1.195 Module1.196 Module1.Un1 Module1.Un2 Module1.Un3 Module1.Un4 R7.1 R102.1 R102.2 R106.1 R106.2 R109.1 R109.2 R114.1 R114.2 R115.1 R115.2 R117.1 R117.2 R118.1 R118.2 S1.MH1 S1.MH2 S2.MH1 S2.MH2 S3.MH1 S3.MH2 SD1.9 SD1.10 U1.17 U1.18 U1.19 U1.20 U1.21 U1.24 U1.25 U1.26 U1.27 U1.28 U1.29 U1.30 U1.31 U1.34 U1.35 U1.36 U1.37 U1.38 U1.39 U1.40 U1.41 U1.44 U1.45 U1.46 U1.47 U1.48 U1.49 U1.50 U1.51 U1.54 U1.55 U1.56 U1.57 U1.58 U1.61 U1.62 U1.63 U1.64 U1.67 U1.68 U1.69 U1.70 U1.72 U1.73 U1.75 U1.76 U1.77 U1.78 U1.79 U1.80 U1.81 U1.82 U1.83 U1.84 U1.85 U1.86 U1.87 U1.88 U1.89 U1.90 U1.91 U1.92 U1.93 U1.94 U1.95 U1.96 U1.97 U1.99 U1.100 U1.101 U1.102 U1.103 U1.104 U1.105 U1.106 U1.109 U1.110 U1.111 U1.112 U1.115 U1.116 U1.117 U1.118 U1.121 U1.122 U1.123 U1.124 U1.127 U1.128 U1.129 U1.130 U1.133 U1.134 U1.135 U1.136 U1.139 U1.140 U1.141 U1.142 U1.143 U1.145 U1.146 U1.147 U1.148 U1.149 U1.151 U1.152 U1.153 U1.154 U1.157 U1.158 U1.159 U1.160 U1.163 U1.164 U1.165 U1.166 U1.169 U1.170 U1.171 U1.172 U1.175 U1.176 U1.177 U1.178 U1.181 U1.182 U1.183 U1.184 U1.187 U1.188 U1.189 U1.190 U1.193 U1.194 U1.195 U1.196 U1.199 U1.200 U1.SH1 U1.SH2 U1.SH3 U1.SH4 U5. U6. U7.4 U8.10 U8.11 U8.12 U8.13 U9.13 U9.36 U9.37 U9.41 U9.42 U9.43 U9.44 U9.45 U9.46 U9.47 U9.48

## Other copper
Top Layer:
  rectangle: 12306.1,6037.4 15373.03,10805.12
  rectangle: 7381.89,6003.94 11417.32,12598.43

## Silkscreen, mask and mechanical layers (free items; w line width, h text height)
Top Overlay:
  lines w10: 129.92,5883.86 1687.99,5883.86 1687.99,6774.61 129.92,6774.61 129.92,5883.86 ; 1896.25,6015.63 2434.23,6015.63 2434.23,6307.12 1896.25,6307.12 1896.25,6015.63 ; 2411.72,5194.83 3075.72,5194.83 3075.72,5722.83 2411.72,5722.83 2411.72,5194.83 ; 2428.15,4326.73 3116.23,4326.73 3116.23,4867.73 2428.15,4867.73 2428.15,4326.73 ; 2470.69,3848.98 2897.69,3848.98 2897.69,4098.98 2470.69,4098.98 2470.69,3848.98 ; 2869.09,6006.89 4490.16,6006.89 4490.16,6443.9 2869.09,6443.9 2869.09,6006.89 ; 3004.16,1208.91 3917.65,1208.91 3917.65,1901.43 3004.16,1901.43 3004.16,1208.91 ; 3071.54,2061.8 3578.54,2061.8 3578.54,2396.8 3071.54,2396.8 3071.54,2061.8 ; 3230.69,48.36 3815.36,48.36 3815.36,345.83 3230.69,345.83 3230.69,48.36 ; 3317.14,580.63 4486.53,580.63 4486.53,982.24 3317.14,982.24 3317.14,580.63 ; 3349.41,4963.58 4273.41,4963.58 4273.41,5857.58 3349.41,5857.58 3349.41,4963.58 ; 3466.98,2584.63 3973.98,2584.63 3973.98,2919.63 3466.98,2919.63 3466.98,2584.63 ; 3475.62,3082.61 3975.62,3082.61 3975.62,3623.61 3475.62,3623.61 3475.62,3082.61 ; 3498.03,3827.46 4422.03,3827.46 4422.03,4721.46 3498.03,4721.46 3498.03,3827.46 ; 3986.22,1209.55 5001.22,1209.55 5001.22,1590.55 3986.22,1590.55 3986.22,1209.55 ; 4073.46,1786.12 4602.46,1786.12 4602.46,2161.12 4073.46,2161.12 4073.46,1786.12 ; 4140.28,2326.52 4640.28,2326.52 4640.28,2867.52 4140.28,2867.52 4140.28,2326.52
  text "Avonics" at 151.73,6760.98 h60
  text "Haptic Feedback" at 2842.68,6474.88 h60
  text "I2C shifter cellular" at 1731.23,6318.63 h60
  text "5V 8A Buck" at 3361.76,5867.96 h60
  text "Microphone" at 2417.72,5745.82 h60
  text "Bat Charger" at 4421.39,5599.88 h60
  text "Speaker" at 2596.23,4906.73 h60
  text "Bat Charger" at 3473.55,4757.36 h60
  text "Diode BAT-Buck IN" at 2430.28,4135 h60
  text "BMS" at 4833.82,3803.31 h60
  text "Diode USB BAT-Buck IN" at 3104.62,3646.61 h60
  text "Diode 5V direct-5V Rail" at 3183.23,2951.93 h60
  text "BMS" at 4133.43,2890.2 h60
  text "Diode 5V Buck out-5V rail" at 2711.54,2439.8 h60
  text "Cell Balancer" at 4052.32,2193.07 h60
  text "3.9V Buck" at 3012.65,1939.91 h60
  text "3V3.M2 Buck" at 3974.72,1619.69 h60
  text "UART shifter" at 3319.53,1017.24 h60
  text "LEDs" at 3244.36,362.36 h60

## Text inside footprints (layer, text, board x,y; h text height)
D13: Top Overlay "+" at 2747.69,4022.98 h60; Top Overlay "-" at 2572.69,4017.99 h60
J19: Top Overlay "2242" at 2113.56,4235.78 h39.37; Top Overlay "M.2 M Key" at 1983.4,2900.79 h39.37; Top Overlay "2260" at 2113.56,4944.44 h39.37; Top Overlay "2280" at 2118.8,5724.43 h39.37; Top Overlay "2230" at 2103.72,3763.34 h39.37
U1: Mechanical 13 "1-100" at 13090.55,3777.56 h32; Mechanical 13 "101-200" at 13090.55,2438.98 h32